# Altium PCB RoketAnaSistemPCB.PcbDoc
Units mm, origin at the board's own origin, x right, y up, seen from the top; angles counter-clockwise.
Board outline 90 x 90 mm, 2 copper layers (Top Layer, Bottom Layer); 21 components, 23 nets, 111 pads, 0 vias.
Unrouted connection lines stored in the file: 6.
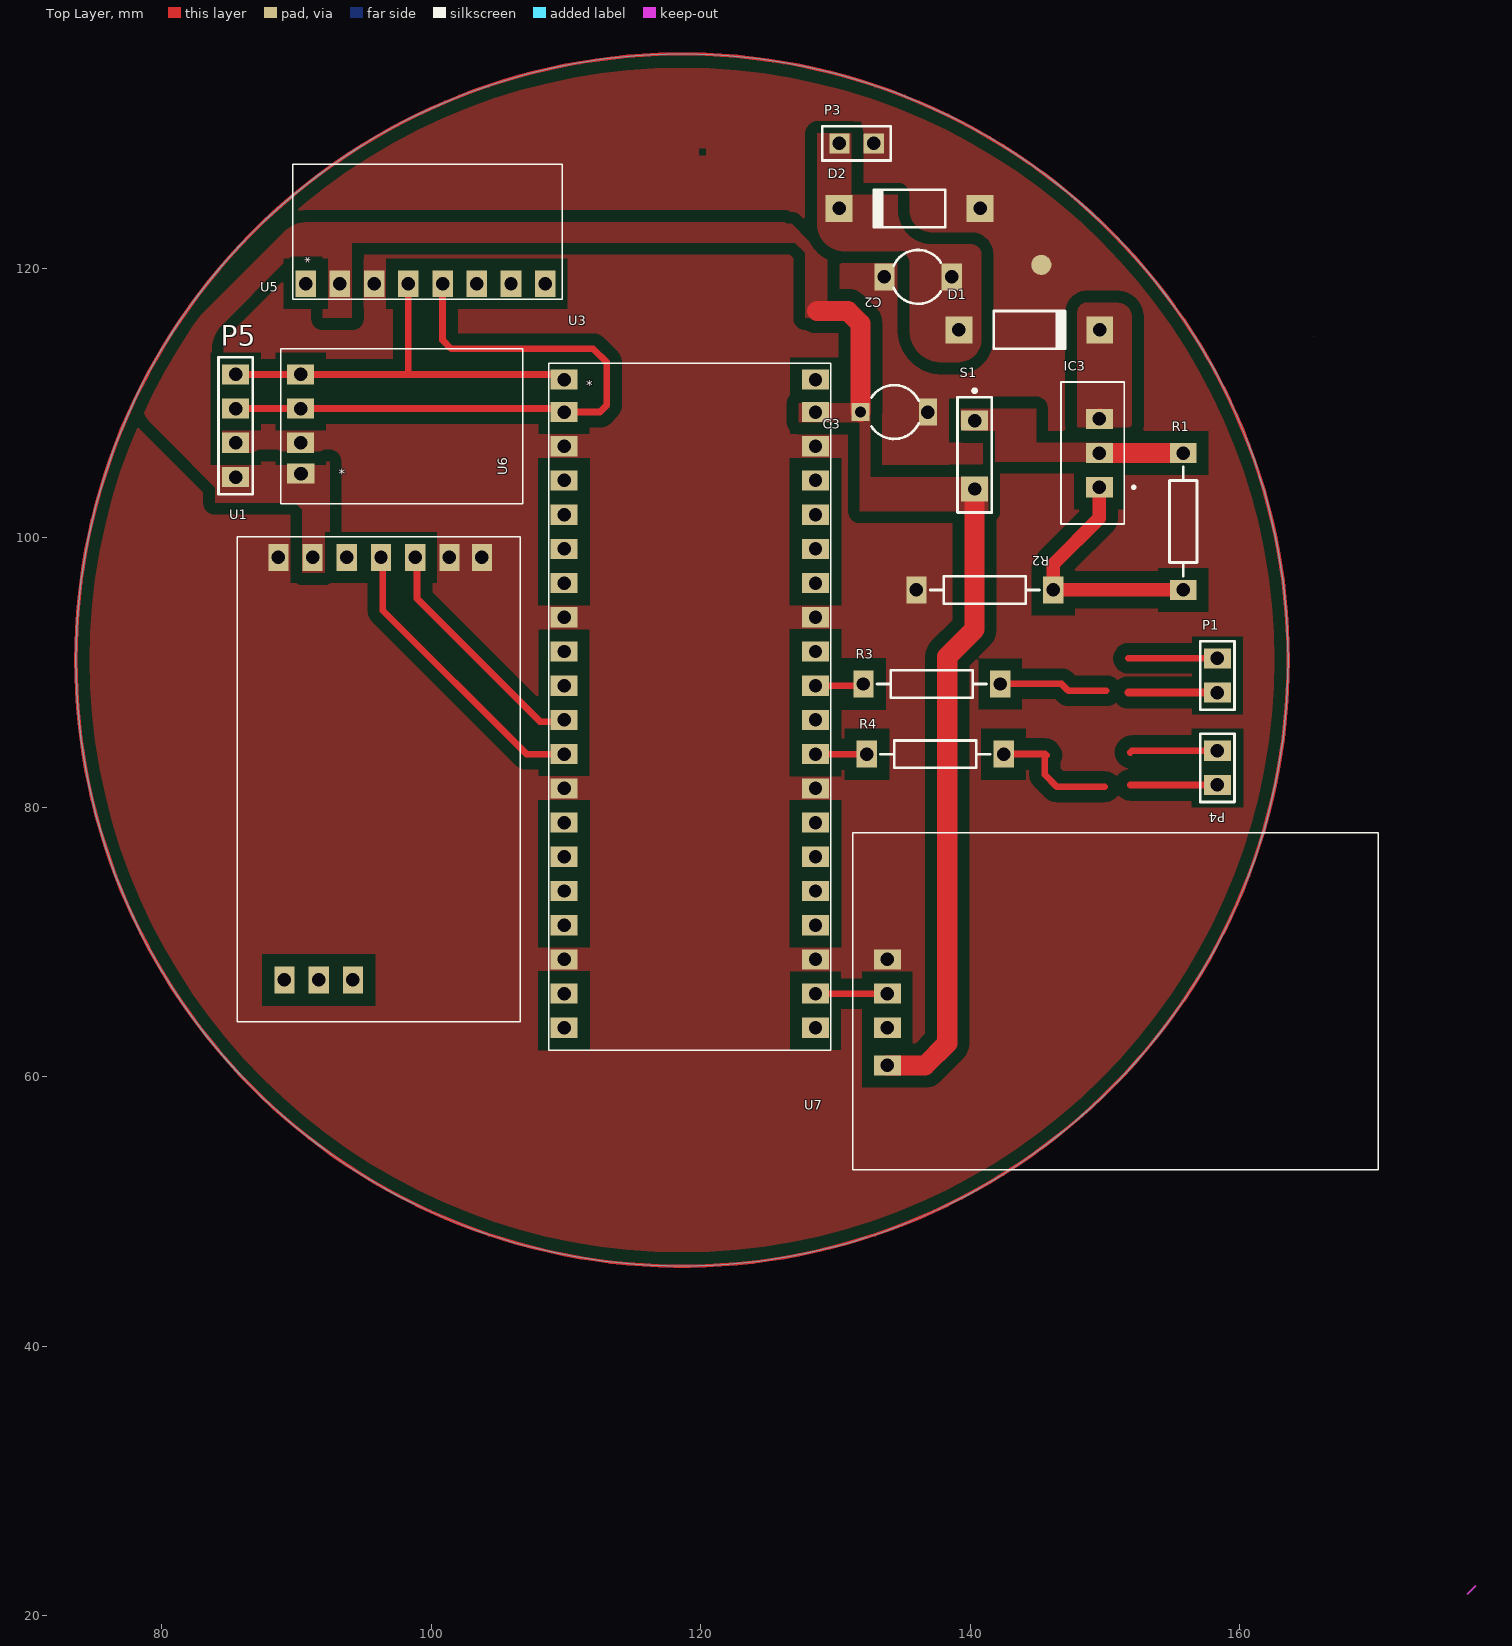
[diagram p0: Top Layer view]
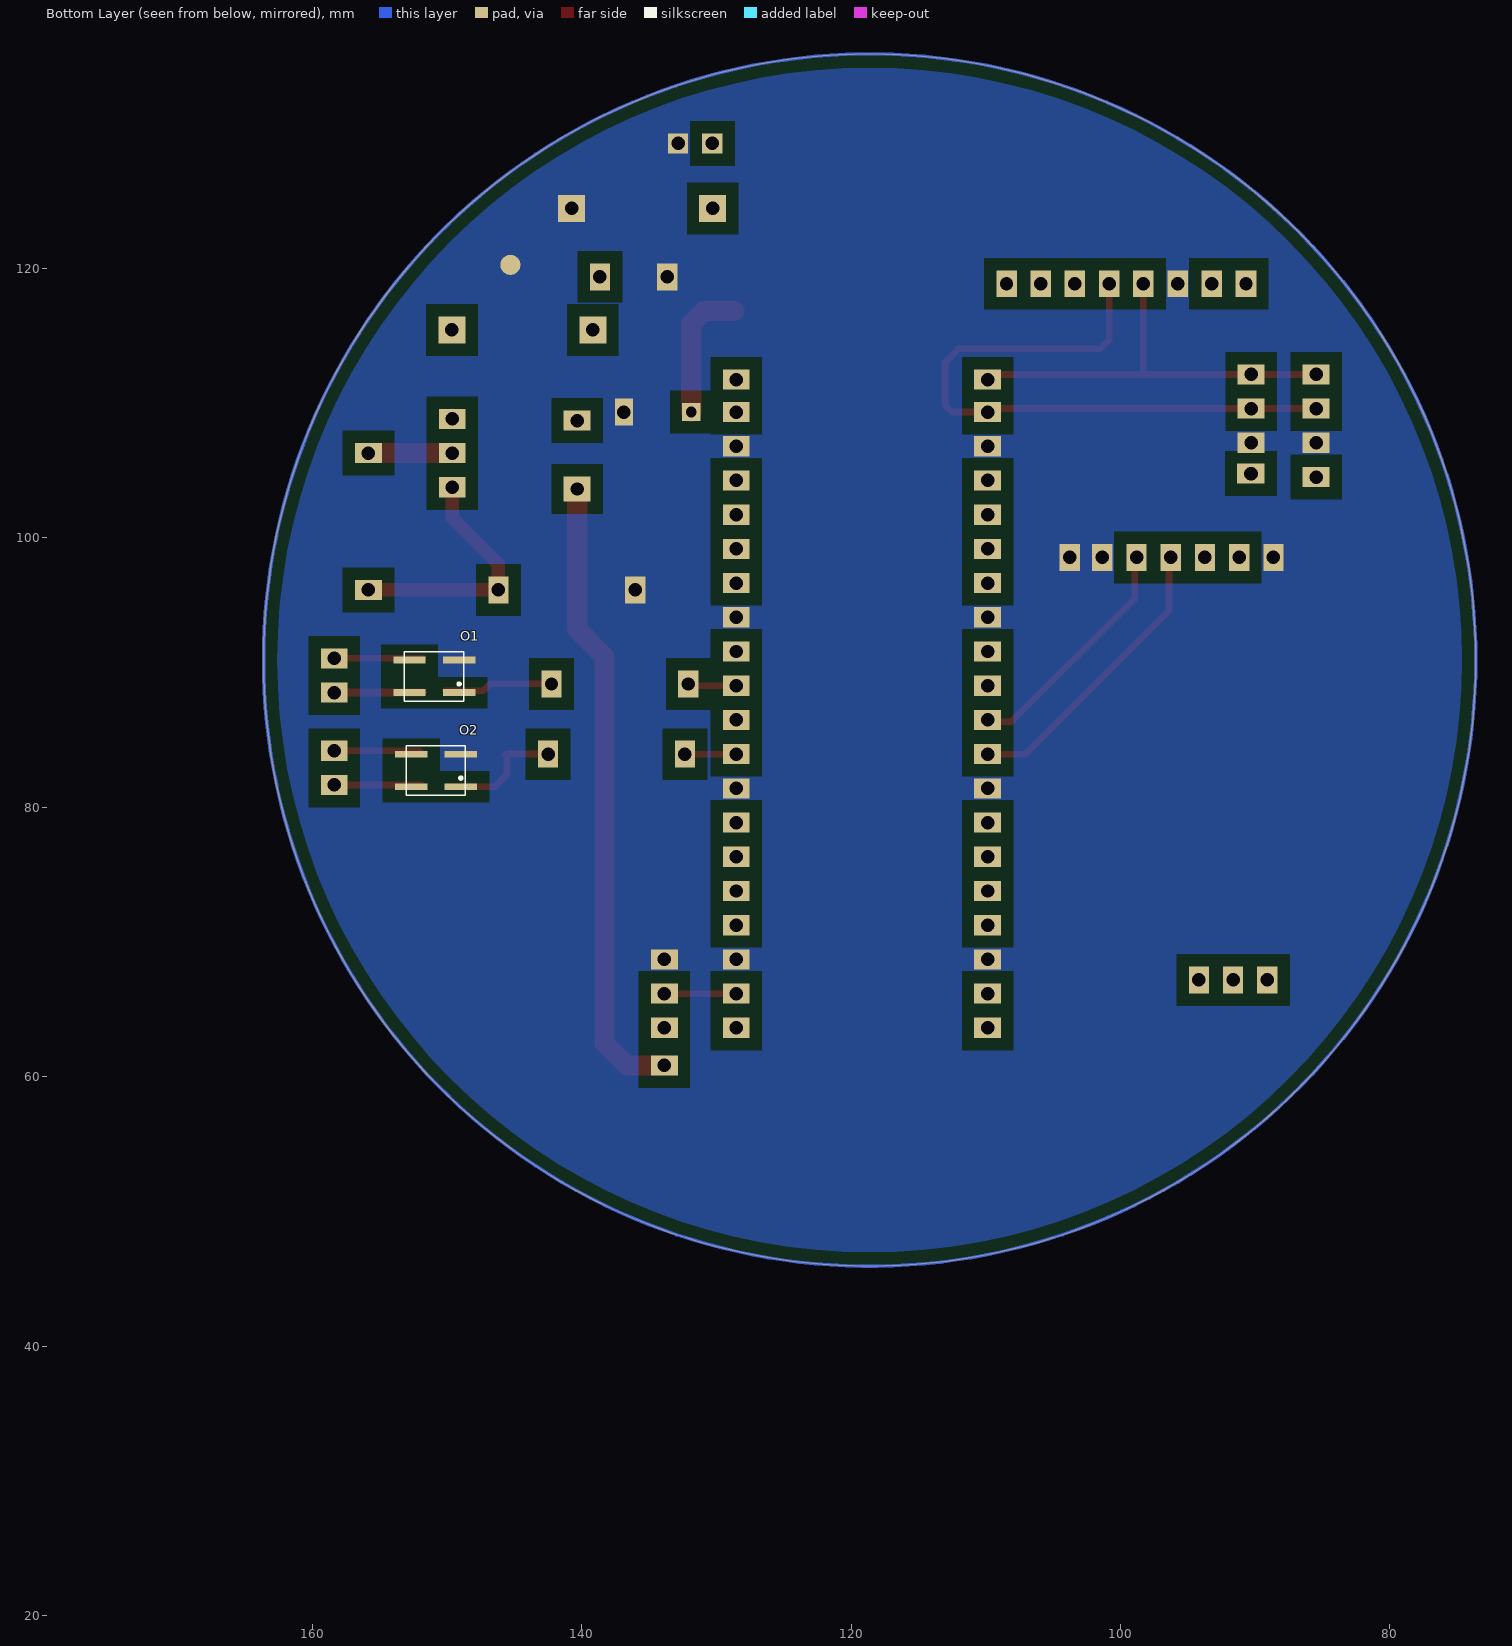
[diagram p1: Bottom Layer view, seen from below]

## Layer stack, top to bottom
Top Solder: solder mask 0.0102, Solder Resist, Dk 3.5
Top Layer: signal copper 0.0356
Dielectric 1: dielectric 0.32, FR-4, Dk 4.8
Bottom Layer: signal copper 0.0356
Bottom Solder: solder mask 0.0102, Solder Resist, Dk 3.5

## Board outline
73.618,90.932 ccw(c118.618,90.932) 118.618,45.932 ccw(c118.618,90.932) 163.618,90.932 ccw(c118.618,90.932) 118.618,135.932 ccw(c118.618,90.932)

## Design rules (kind name [scope] priority, off if disabled: settings)
Clearance [All] p1: gap=0.254 ignorepadtopadclearanceinfootprint=TRUE except(0: Arc-Hole Track-Hole SMDPad-Hole THPad-Hole Via-Hole Fill-Hole Poly-Hole Region-Hole Text-Hole; 0.9: Arc-Fill Arc-Poly Track-Fill Track-Poly SMDPad-Fill SMDPad-Poly THPad-Fill THPad-Poly Via-Fill Via-Poly Fill-Fill Fill-Poly Poly-Poly)
PolygonConnect [All] p1: connectstyle=Direct reliefconductorwidth=0.254 reliefentries=4 polygonreliefangle="90 Angle" airgapwidth=0.254
RoomDefinition RoketAnaSistemSematik [InComponentClass('RoketAnaSistemSematik')] p1: confinementstyle=ConfineIn formatcopy=TRUE lockcomponents=FALSE outline 62.738,34.544 205.105,34.544 205.105,137.033 62.738,137.033
RoutingVias [All] p1: holewidth=0.711 width=1.27 viastyle="Through Hole" minholewidth=0.711 minwidth=1.27 maxholewidth=0.711 maxwidth=1.27
SolderMaskExpansion [All] p1: expansion=0.102 istentingtop=FALSE
Width [All] p1: maxlimit=2 minlimit=0.254 preferedwidth=1
30 further rules are at their usual default settings.

## Components (designator, comment, footprint, x,y, rotation, side; value= is the part's Value field where it differs from the comment)
C2 "Cap2" CAPR5-4X5#1 136.144,119.38 r180 top value=100pF
C3 "Cap2" CAPR5-4X5#2 134.366,109.347 r0 top value=100pF
D1 "Diode 1N4001" DO-41 144.399,115.443 r0 top
D2 "Diode 1N4001" DO-41 135.509,124.46 r180 top
IC3 "LM317T" LM317 149.606,106.299 r90 top
O1 "OPTOKUPLÖR" OPTOKUPLÖR 152.146,89.789 r0 bottom
O2 "OPTOKUPLÖR" OPTOKUPLÖR 152.019,82.804 r0 bottom
P1 "Header 2" HDR1X2#1 158.369,88.519 r90 top
P3 "Header 2" HDR1X2#2 132.842,129.286 r180 top
P4 "Header 2" HDR1X2#1 158.369,81.661 r90 top
P5 "Header 4" HDR1X4 85.471,104.521 r90 top
R1 "Res2" AXIAL-0.4 155.829,101.219 r90 top value=240
R2 "Res2" AXIAL-0.4 141.097,96.139 r180 top value=400
R3 "Res2" AXIAL-0.4 137.16,89.154 r180 top value=1K
R4 "Res2" AXIAL-0.4 137.414,83.947 r180 top value=1K
S1 "SW-SPST" SPST-2 140.335,106.172 r270 top
U1 "LORA E32 433T20D" "LORA E32 433T20D" 85.725,94.996 r0 top
U3 "PICO" "RASSBERY PI PICO" 112.268,63.373 r0 top
U5 "LPS25H MODULE" "LPS25H SENSOR" 110.363,117.856 r90 top
U6 "BMP280 MODULE" "BMP280 MODULE" 106.934,114.554 r180 top
U7 "NEO 7M GPS MODULE" "NEO 7M GPS MODULE" 170.434,80.137 r180 top

## Footprints (in the part's own frame and the unit in brackets; to place one, negate y for a bottom-side part, rotate by r counter-clockwise, add the part's x,y. Pads: shape width x height; smd on the part's side, far side on the other; paste and mask are expansions set on the pad)
AXIAL-0.4 [mm] "Axial Device, Thru-Hole; 2 Leads; 0.4 in Pin Spacing"
  rect 1.5x2 hole 1: 1(-5.08,0) 2(5.08,0)
  silkscreen extent -4.06,-1.02 4.06,1.02
"BMP280 MODULE" [mm] "SENSOR MODULE"
  rect 2x1.5 hole 1: 1(16.601,9.777) 1(16.637,9.779) 2(16.637,7.493) 3(16.637,4.953) 4(16.637,2.413)
  silkscreen extent 0.13,0.51 18.13,12.01
CAPR5-4X5#1 [mm] "Capacitor; 2 Leads"
  rect 1.5x2 hole 1: 1(-2.5,0) 2(2.5,0)
  silkscreen extent -1.69,-2 1.82,2
CAPR5-4X5#2 [mm] "Capacitor; 2 Leads"
  rect 1.35x1.35 hole 0.8: 1(-2.5,0)
  rect 1.35x2 hole 1: 2(2.5,0)
  silkscreen extent -1.69,-2 1.82,2
DO-41 [mm] "Diode, Axial; Body 5.2 x 2.7 mm (LxDia. max), Lead Dia. 0.86 mm (max)"
  rect 2x2 hole 1: 1(-5.23,0) 2(5.23,0)
  silkscreen extent -2.65,-1.4 2.75,1.4
HDR1X2#1 [mm] "Connector; Header; 2 Position"
  rect 1.5x2 hole 1: 1(0,0) 2(2.54,0)
  silkscreen extent -1.27,-1.27 3.81,1.27
HDR1X2#2 [mm] "Connector; Header; 2 Position"
  rect 1.5x1.5 hole 1: 1(0,0) 2(2.54,0)
  silkscreen extent -1.27,-1.27 3.81,1.27
HDR1X4 [mm] "Connector; Header; 4 Position"
  rect 1.5x2 hole 1: 1(0,0) 2(2.54,0) 3(5.08,0) 4(7.62,0)
  silkscreen extent -1.27,-1.27 8.89,1.27
LM317 [mm] "1.5A ADJ LINEAR REGULATOR"
  rect 1.5x2 hole 1: 1(-2.54,0) 2(0,0) 3(2.54,0)
  silkscreen extent -5.27,-2.64 5.27,2.86
"LORA E32 433T20D" [mm] "LORA E32 433T20D RF MODULE"
  rect 1.5x2 hole 1: 1(18.034,3.556) 1(18.034,3.556) 2(15.621,3.556) 3(13.081,3.556) 4(10.541,3.556) 5(8.001,3.556) 6(5.461,3.556) 7(2.921,3.556) ""(3.373,-27.813) ""(5.913,-27.813) ""(8.453,-27.813)
  silkscreen extent -0.13,-30.92 20.87,5.08
"LPS25H SENSOR" [mm] "SENSOR MODULE"
  rect 2x1.524 hole 1: 1(1.016,19.685) 1(1.016,19.685) 2(1.016,17.145) 3(1.016,14.605) 4(1.016,12.065) 5(1.016,9.525) 6(1.016,6.985) 7(1.016,4.445) 8(1.016,1.905)
  silkscreen extent -0.13,0.64 9.87,20.64
"NEO 7M GPS MODULE" [mm] "GPS MODULE"
  rect 2x1.5 hole 1: 1(36.576,19.304) 1(36.576,19.304) 2(36.576,16.51) 3(36.576,13.97) 4(36.576,11.43)
  silkscreen extent 0.13,2.03 39.13,27.03
OPTOKUPLÖR [mm]
  rect 2.4x0.5 smd: 1(-3.048,1.27) 2(-3.048,-1.143) 3(0.635,-1.143) 4(0.635,1.27)
  silkscreen extent -3.38,-1.78 1.02,1.91
"RASSBERY PI PICO" [mm] "PROCESSOR MODULE"
  rect 2x1.5 hole 1 mask+0.1: 1(-2.413,48.387) 1(-2.413,48.387) 2(-2.413,45.974) 3(-2.413,43.434) 4(-2.413,40.894) 5(-2.413,38.354) 6(-2.413,35.814) 7(-2.413,33.274) 8(-2.413,30.734) 9(-2.413,28.194) 10(-2.413,25.654) 11(-2.413,23.114) 12(-2.413,20.574) 13(-2.413,18.034) 14(-2.413,15.494) 15(-2.413,12.954) 16(-2.413,10.414) 17(-2.413,7.874) 18(-2.413,5.334) 19(-2.413,2.794) 20(-2.413,0.254) 21(16.256,0.254) 22(16.256,2.794) 23(16.256,5.334) 24(16.256,7.874) 25(16.256,10.414) 26(16.256,12.954) 27(16.256,15.494) 28(16.256,18.034) 29(16.256,20.574) 30(16.256,23.114) 31(16.256,25.654) 32(16.256,28.194) 33(16.256,30.734) 34(16.256,33.274) 35(16.256,35.814) 36(16.256,38.354) 37(16.256,40.894) 38(16.256,43.434) 39(16.256,45.974) 40(16.256,48.387)
  silkscreen extent -3.56,-1.4 17.41,49.6
SPST-2 [mm] "Switch; 2 Leads"
  rect 1.5x2 hole 1: 1(-2.54,0)
  rect 1.85x2 hole 1: 2(2.54,0)
  silkscreen extent -4.89,-1.27 4.28,1.27

## Part data
C2 C3: "Capacitor", PackageDescription="Capacitor; 2 Leads", PackageReference=CAPR5-4X5, Published=23-Sep-2002, Publisher="Altium Limited"
D1 D2: "1 Amp General Purpose Rectifier", Code_JEDEC=DO-204-AL, ComponentLink1Description="Manufacturer Link", ComponentLink1URL=http://www.fairchildsemi.com/, ComponentLink2Description=Datasheet, ComponentLink2URL=http://www.fairchildsemi.com/ds/1N%2F1N4001.pdf, DatasheetVersion=1998, LatestRevisionDate=17-Jul-2002, LatestRevisionNote="Re-released for DXP Platform.", PackageDescription="Diode, Axial; Body 5.2 x 2.7 mm (LxDia. max), Lead Dia. 0.86 mm (max)", PackageReference=DO-41, PackageVersion=Aug-1999, Published=8-Jun-2000, Publisher="Altium Limited"
IC3: "1.5-A, 40-V, adjustable linear voltage regulator 3-TO-220", Package="TO-220-3 Texas Instruments", Arrow_Electronics-Purchase-URL=https://snapeda.com/shop?store=Arrow+Electronics&id=2756289, Availability=Unavailable, DigiKey-Purchase-URL=https://snapeda.com/shop?store=DigiKey&id=2756289, MF="Texas Instruments", Mouser-Purchase-URL=https://snapeda.com/shop?store=Mouser&id=2756289, MP=LM317T, Price=None, SnapEDA_Link=https://www.snapeda.com/parts/LM317T/Texas%20Instruments/view-part/2756289/?ref=snap
P1 P3 P4: "Header, 2-Pin", LatestRevisionDate=17-Jul-2002, LatestRevisionNote="Re-released for DXP Platform.", Publisher="Altium Limited"
P5: "Header, 4-Pin", LatestRevisionDate=17-Jul-2002, LatestRevisionNote="Re-released for DXP Platform.", Publisher="Altium Limited"
R1 R2 R3 R4: "Resistor", LatestRevisionDate=17-Jul-2002, LatestRevisionNote="Re-released for DXP Platform.", PackageDescription="Axial Device, Thru-Hole; 2 Leads; 0.4 in Pin Spacing", PackageReference=AXIAL-0.4, Published=8-Jun-2000, Publisher="Altium Limited"
S1: "Single-Pole, Single-Throw Switch", LatestRevisionDate=17-Jul-2002, LatestRevisionNote="Re-released for DXP Platform.", PackageDescription="Switch; 2 Leads", PackageReference=SPST-2, Published=24-Mar-1999, Publisher="Altium Limited"
U1: "LORA E32 433T20D RF MODULE"
U3: library part "Rasspberry Pi Pico", "133MHz MICROCONTROLLER"
U5: "ALTITUDE, PRESSURE SENSOR MODULE"
U6: "PRESSURE,ALTITUDE SENSOR MODULE"

## Free pads (board coordinates)
  round 1.5 all layers, no hole: 2(145.288,120.269)

## Nets (pads, with @x,y where several pads share a name; then routed paths per layer and width w, separated by ;. In a path a pad name is that pad's centre, name@x,y a point inside that pad or via, vN(x,y) a via of type N, cw(c..) or ccw(c..) an arc to the next point about the centre after c; other vN are vias at no path point)
+3V3: C3.1 P5.1 S1.2 U1.6 U3.39 U5.2 U6.1 U7.1 | length 57.3
  Top Layer w1.5: 128.651,116.84 130.937,116.84 131.866,115.911 C3.1 ; U7.1@133.858,60.833 136.652,60.833 138.303,62.484 138.303,91.186 140.335,93.218 S1.2
C_1: O1.4 P1.1 | length 6.6
  Top Layer w0.6: 151.765,88.519 P1.1
C_2: O2.4 P4.1 | length 6.5
  Top Layer w0.5: 151.892,81.661 P4.1
CSN: U3.17
E_1: O1.3 P1.2 | length 6.6
  Top Layer w0.5: 151.765,91.059 P1.2
E_2: O2.3 P4.2 | length 6.5
  Top Layer w0.5: 151.892,84.074 152.019,84.201 P4.2
GND: C2.2 C3.2 D2.1 O1.2 O2.2 P3.1 P5.2 pad.2 R2.2 U1.1 U1.2 U1.7 U3.3 U3.8 U3.13 U3.18 U3.23 U3.28 U3.33 U3.38 U5.3 U6.2 U7.4
GPS_TX: U3.22 U7.3 | length 5.3
  Top Layer w0.5: U3.22 U7.3
I2C_SCL0: P5.3 U3.2 U5.5 U6.3 | length 48.8
  Top Layer w0.5: P5.3@84.836,109.601 P5.3 U6.3 109.601,109.601 U3.2 112.522,109.347 113.03,109.855 113.03,113.03 112.014,114.046 101.473,114.046 100.838,114.681 U5.5
I2C_SDA0: P5.4 U3.1 U5.4 U6.4 | length 31.9
  Top Layer w0.5: P5.4@84.836,112.141 P5.4 U6.4 98.298,112.141 ; U5.4 98.298,112.141 ; U3.1@109.855,111.76 109.474,112.141 98.298,112.141
LED_IN_1: R3.2 U3.31 | length 3.6
  Top Layer w0.5: U3.31 131.953,89.027 R3.2
LED_IN_2: R4.2 U3.29 | length 3.8
  Top Layer w0.5: U3.29 R4.2
MISO: U3.16
MOSI: U3.15
NetD1_2: D1.2 IC3.3 | length 0
  Top Layer w1.5: IC3.3 ccw(c149.606,108.862) IC3.3@149.629,108.862
NetO1_1: O1.1 R3.1 | length 8.1
  Top Layer w0.5: R3.1 142.252,89.166 145.669,89.166 146.8,89.166 147.32,88.646 150.114,88.646
NetO2_1: O2.1 R4.1 | length 9.6
  Top Layer w0.5: R4.1 142.506,83.959 145.542,83.959 145.569,83.959 145.669,83.859 145.542,83.859 145.542,82.423 146.431,81.534 149.987,81.534
NetR1_1: IC3.1 R1.1 R2.1 | length 18.7
  Top Layer w1: IC3.1 149.606,101.473 146.177,98.044 R2.1 R1.1
NetR1_2: IC3.2 R1.2 S1.1 | length 6.2
  Top Layer w1.5: IC3.2 R1.2
RF_RX: U1.3 U3.11 | length 17.9
  Top Layer w0.5: U1.3 98.933,98.425 98.933,95.504 108.077,86.36 109.728,86.36 U3.11
RF_TX: U1.4 U3.12 | length 21.9
  Top Layer w0.5: U1.4 96.393,98.425 96.393,94.615 107.061,83.947 U3.12
SCK: U3.14
VCC: C2.1 D1.1 D2.2 P3.2
pads on no net: U1. U1.5 U3.4 U3.5 U3.6 U3.7 U3.9 U3.10 U3.19 U3.20 U3.21 U3.24 U3.25 U3.26 U3.27 U3.30 U3.32 U3.34 U3.35 U3.36 U3.37 U3.40 U5.1 U5.6 U5.7 U5.8 U7.2

## Polygon pours and split planes (outlines as drawn)
GND on Top Layer "NONET_L-01_P-001" (solid, remove dead copper, pour order 113): 73.618,90.932 ccw(c118.618,90.932) 118.618,45.932 ccw(c118.618,90.932) 163.618,90.932 ccw(c118.618,90.932) 118.618,135.932 ccw(c118.618,90.932)
+3V3 on Top Layer "NONET_L-01_P-001" (solid, remove dead copper, pour order 106): 129.413,116.332 129.413,120.65 126.746,123.317 126.365,123.317 126.238,123.444 91.948,123.444 91.948,116.332 92.329,116.332 93.345,116.332 94.107,116.332 94.107,121.92 127,121.92 127.762,121.158 127.762,116.332
+3V3 on Top Layer "NONET_L-01_P-001" (solid, remove dead copper, pour order 110): 85.09,102.616 79.23,108.476 cw(c81.026,110.272) 78.486,110.272 78.486,111.379 cw(c80.326,111.379) 79.025,112.68 89.045,122.7 cw(c90.841,120.904) 90.841,123.444 93.091,123.444 ccw(c93.398,123.444) 93.181,123.227 94.234,122.174 93.708,121.648 cw(c91.912,123.444) 91.912,120.904 89.789,120.904 ccw(c89.789,120.291) 89.355,120.724 84.437,115.806 ccw(c86.233,114.01) 83.693,114.01 83.693,105.41 86.614,105.41 cw(c85.847,104.643) 86.931,104.643 86.931,102.616
no net on Top Layer "NONET_L-01_P-001" (solid, pour order 108): 90.17,125.73
+3V3 on Top Layer "NONET_L-01_P-001" (solid, pour order 105): 83.947,105.664 92.456,105.664 92.456,97.536 92.583,97.409 90.424,97.409 90.424,102.108 89.916,102.616 83.947,102.616
+3V3 on Top Layer "NONET_L-01_P-001" (solid, pour order 104): 141.351,104.394 141.224,104.521 132.588,104.521 132.588,109.982 127,109.982 127,108.585 131.826,108.585 131.826,101.981 141.351,101.981
NetR1_2 on Top Layer "NONET_L-01_P-001" (solid, pour order 103): 150.622,106.934 150.495,107.061 144.907,107.061 144.907,109.601 139.319,109.601 139.319,108.204 139.573,107.95 141.859,107.95 141.859,105.664 150.622,105.664
NetD1_2 on Top Layer "NONET_L-01_P-001" (solid, pour order 102): 150.876,117.475 cw(c150.876,116.332) 152.019,116.332 152.019,108.458 cw(c151.765,108.458) 151.765,108.204 148.082,108.204 cw(c148.082,108.331) 147.955,108.331 147.955,116.713 cw(c148.717,116.713) 148.717,117.475
VCC on Top Layer "NONET_L-01_P-001" (solid, remove dead copper, pour order 101): 131.191,130.048 131.191,125.476 134.62,125.476 134.62,124.333 ccw(c137.16,124.333) 137.16,121.793 140.081,121.793 cw(c140.081,121.031) 140.843,121.031 140.843,114.808 cw(c139.065,114.808) 139.065,113.03 137.922,113.03 cw(c137.922,115.443) 135.509,115.443 135.509,120.396 ccw(c134.62,120.396) 134.62,121.285 130.683,121.285 cw(c130.683,123.317) 128.651,123.317 128.651,130.048
no net on Top Layer "NONET_L-01_P-001" (solid, pour order 88): 83.947,105.156
no net on Top Layer "NONET_L-01_P-001" (solid, pour order 70): 130.874,122.301
no net on Top Layer "NONET_L01_P027" (solid, pour order 27): 65.659,112.776
no net on Top Layer "NONET_L01_P020" (solid, pour order 20): 83.058,73.406
no net on Top Layer "NONET_L01_P003" (solid, shelved, pour order 3): 59.817,103.505
no net on Top Layer "NONET_L01_P002" (solid, shelved, pour order 2): 57.023,106.807
GND on Bottom Layer "NONET_L-01_P-001" (solid, remove dead copper, pour order 112): 73.618,90.932 ccw(c118.618,90.932) 118.618,45.932 ccw(c118.618,90.932) 163.618,90.932 ccw(c118.618,90.932) 118.618,135.932 ccw(c118.618,90.932)
no net on Bottom Layer "NONET_L-01_P-001" (solid, pour order 95): 77.978,131.572

## Keep-outs
Top Layer:
  region: 165.481,114.935
  lines w0.1: 176.911,21.59 177.546,22.225

## Other copper
Top Layer:
Multi-Layer:
  circle w0.254: c118.618,90.932 r45

## Text inside footprints (layer, text, board x,y; h text height)
U3: Top Overlay "*" at 111.506,111.007 h0.71
U5: Top Overlay "*" at 91.304,120.396 h0.71 r90
U6: Top Overlay "*" at 93.599,105.401 h0.71 r180